# Altium PCB MedusaTester.PcbDoc
Units mil, origin at the board's own origin, x right, y up, seen from the top; angles counter-clockwise.
Board outline 3650 x 3280 mil, 2 copper layers (Top Layer, Bottom Layer); 21 components, 119 nets, 319 pads, 9 vias.
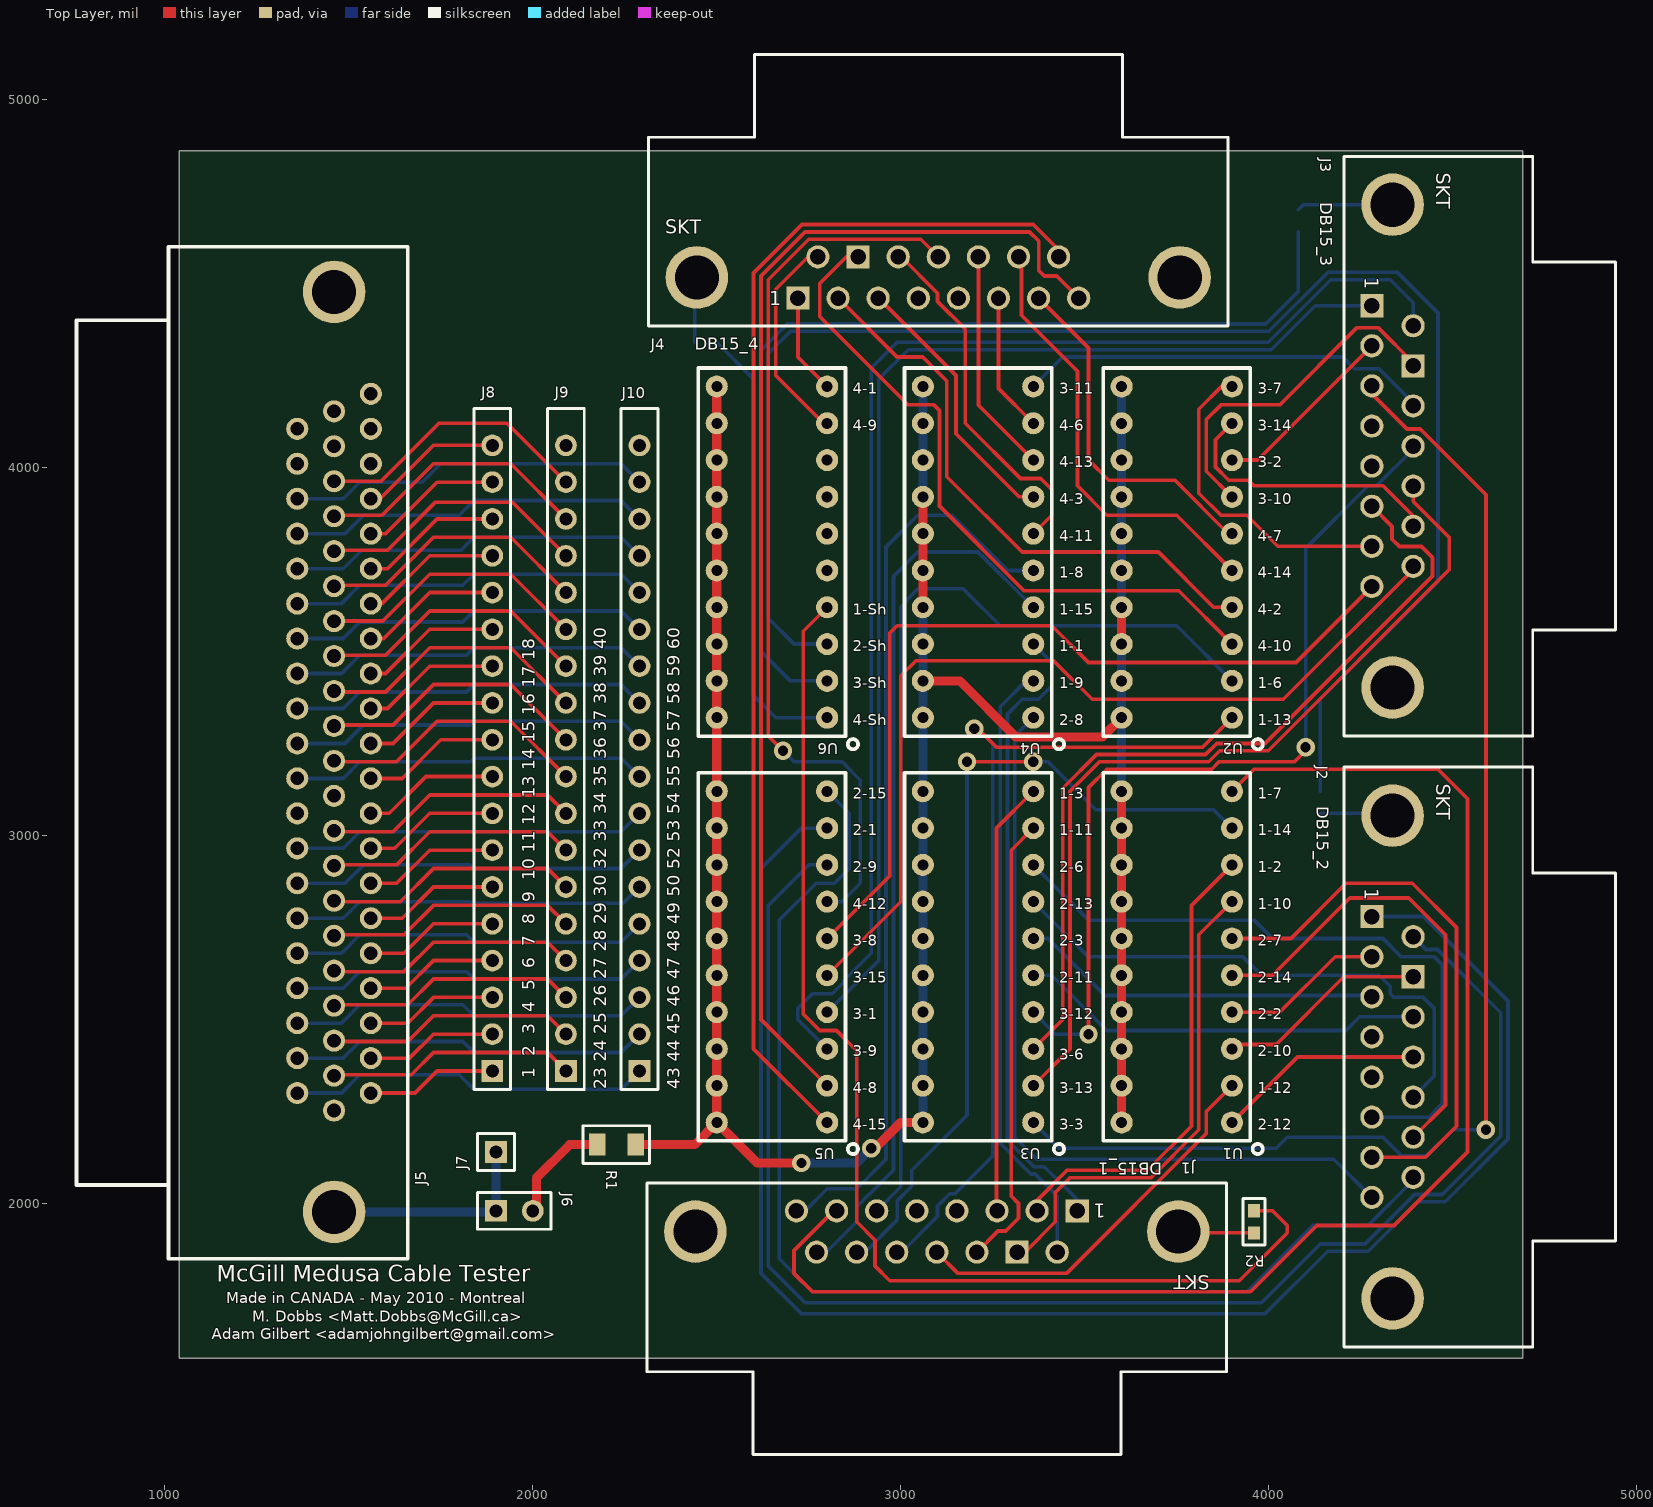
[diagram p0: Top Layer view]
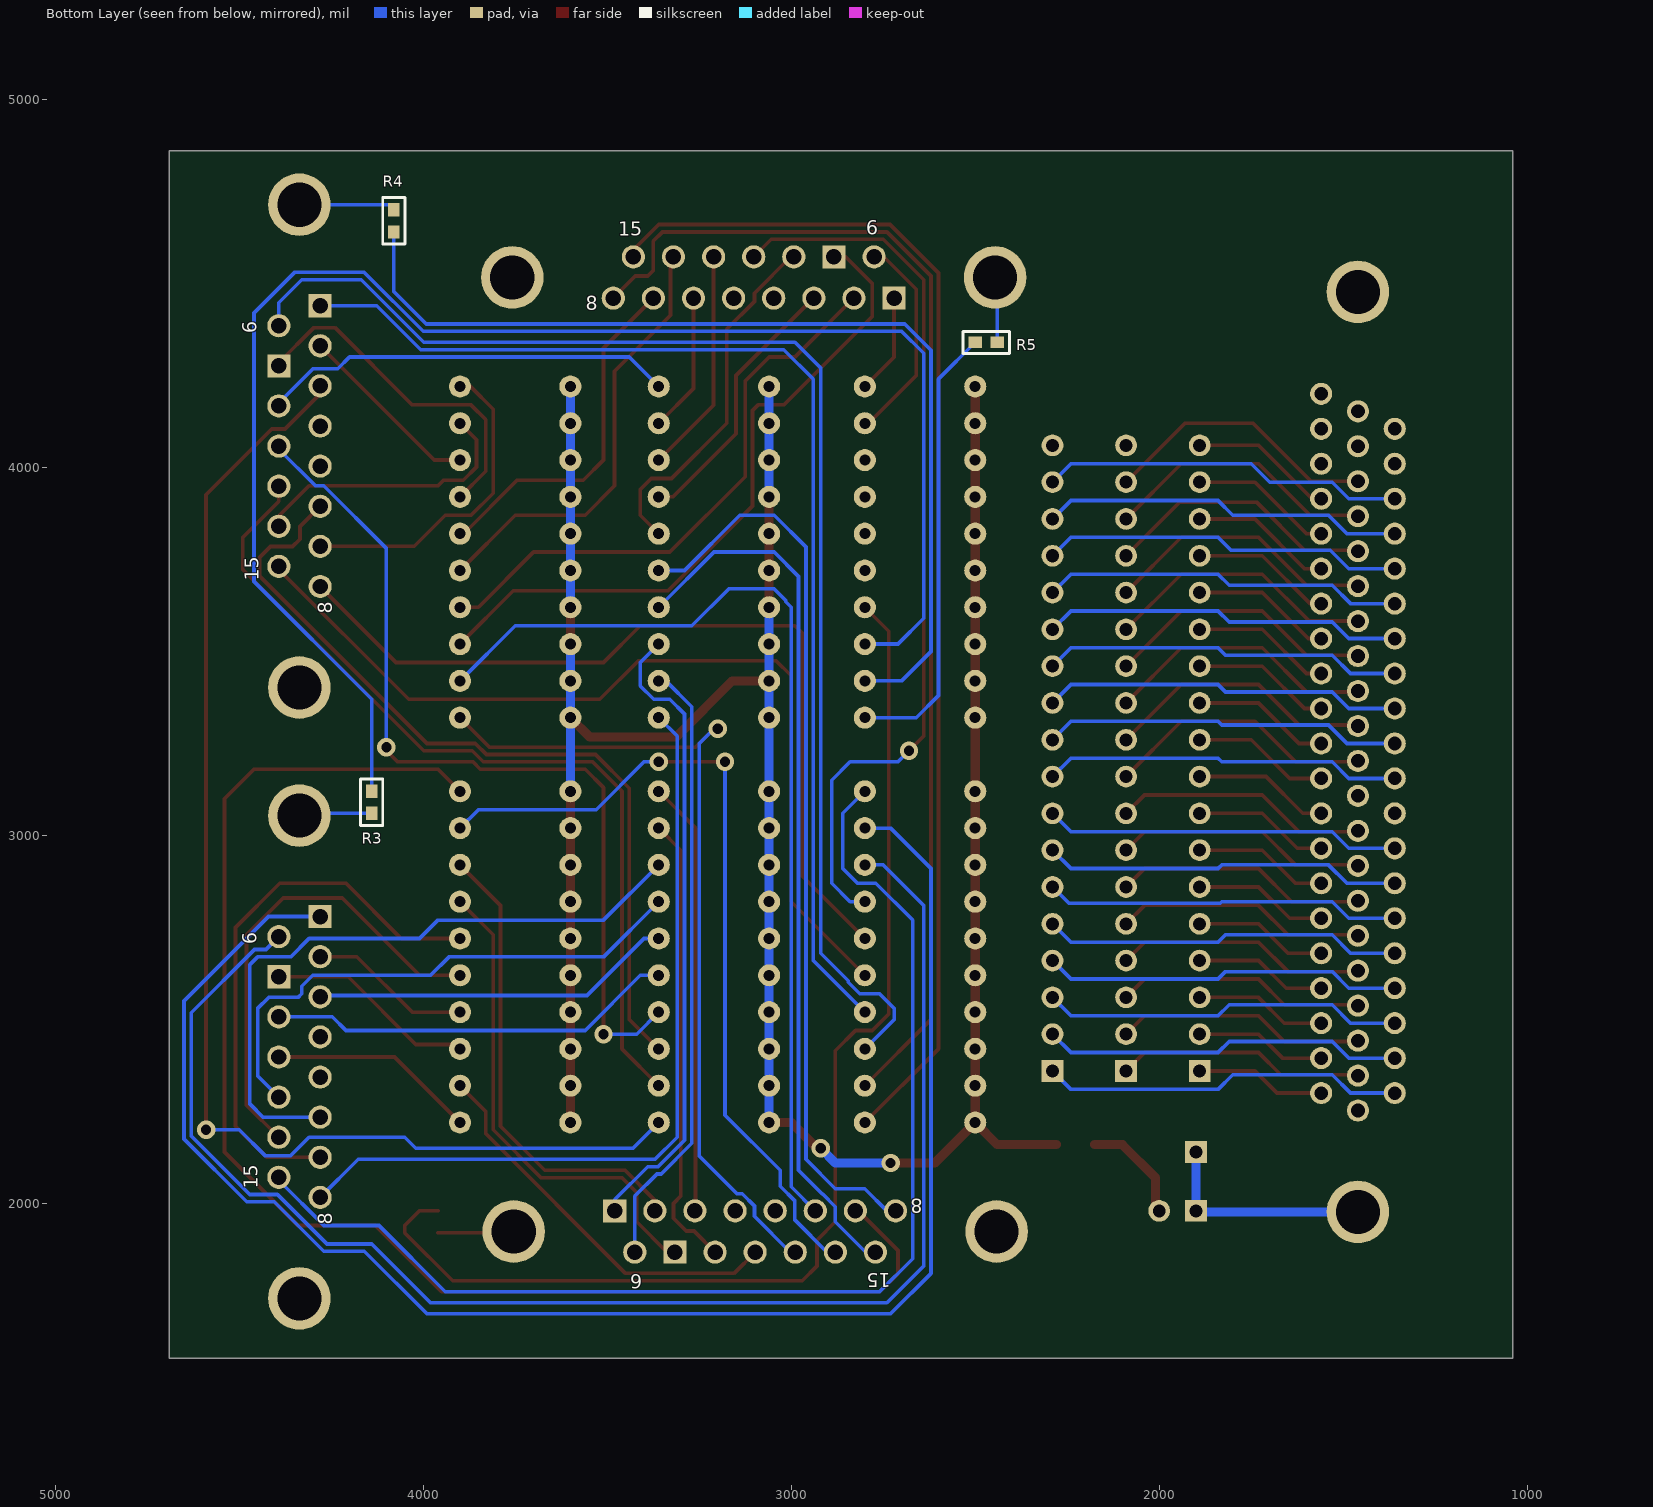
[diagram p1: Bottom Layer view, seen from below]

## Layer stack, top to bottom
Top Layer: signal copper 1.4
Dielectric: core 12.6, FR-4, Dk 4.8
Bottom Layer: signal copper 1.4

## Board outline
1040,4860 1040,1580 4690,1580 4690,4860

## Design rules (kind name [scope] priority, off if disabled: settings)
Clearance [All] p1: gap=10
HoleSize [All] p1: absolutevalues=TRUE maxlimit=150 minlimit=1 maxpercent=80.000 minpercent=20.000
PolygonConnect [All] p1: connectstyle=Relief reliefconductorwidth=10 reliefentries=4 polygonreliefangle="90 Angle"
RoutingVias [All] p1: holewidth=28 width=50 viastyle="Through Hole" minholewidth=28 minwidth=50 maxholewidth=28 maxwidth=50
SilkscreenOverComponentPads [All] p1: minsilkscreentomaskgap=10
SolderMaskExpansion [All] p1: expansion=4
Width [All] p1: maxlimit=100 minlimit=10 preferedwidth=10
26 further rules are at their usual default settings.

## Classes and differential pairs
component class LEDs: R1 U1 U2 U3 U4 U5 U6
component class MedussaTester: J1 J2 J3 J4 J5 J6 J7 J8 J9 J10 R2 R3 R4 R5

## Components (designator, comment, footprint, x,y, rotation, side; value= is the part's Value field where it differs from the comment)
J1 "DB15_FEMALE" DSUB/RS.318/TM/15 3480,1980 r180 top
J2 "DB15_FEMALE" DSUB/RS.318/TM/15 4280,2780 r270 top
J3 "DB15_FEMALE" DSUB/RS.318/TM/15 4280,4440 r270 top
J4 "DB15_FEMALE" DSUB/RS.318/TM/15 2720,4460 r0 top
J5 "HD_DB62" HD_DB62 1560,4200 r270 top
J6 "Header2" HDR1X2 1900,1980 r0 top
J7 "Header1" HDR1 1900,2140 r90 top
J8 "Header18" HDR1X18 1890,2360 r90 top
J9 "Header18" HDR1X18 2090,2360 r90 top
J10 "Header18" HDR1X18 2290,2360 r90 top
R1 "25" 1206 2280,2160 r180 top
R2 "10k Ohms" 0603 3960,1980 r270 top
R3 "10k Ohms" 0603 4140,3120 r270 bottom
R4 "10k Ohms" 0603 4080,4640 r90 bottom
R5 "10k Ohms" 0603 2500,4340 r180 bottom
U1 "LED10array" LED10array 3900,2220 r180 top
U2 "LED10array" LED10array 3900,3320 r180 top
U3 "LED10array" LED10array 3360,2220 r180 top
U4 "LED10array" LED10array 3360,3320 r180 top
U5 "LED10array" LED10array 2800,2220 r180 top
U6 "LED10array" LED10array 2800,3320 r180 top

## Footprints (in the part's own frame and the unit in brackets; to place one, negate y for a bottom-side part, rotate by r counter-clockwise, add the part's x,y. Pads: shape width x height; smd on the part's side, far side on the other; paste and mask are expansions set on the pad)
0603 [mil]
  rect 36x32 smd: 1(0,0) 2(60,0)
  silkscreen extent -33,-30 93,30
1206 [mil]
  rect 45x60 smd: 1(0,0) 2(105,0)
  silkscreen extent -37,-51 144,51
DSUB/RS.318/TM/15 [mil]
  rect 63x63 hole 42: 1(0.47,0.25) 10(163.97,112.25)
  round 63 hole 42: 2(109.47,0.25) 3(218.47,0.25) 4(327.47,0.25) 5(436.47,0.25) 6(545.47,0.25) 7(654.47,0.25) 8(763.47,0.25) 9(54.97,112.25) 11(272.97,112.25) 12(381.97,112.25) 13(490.97,112.25) 14(599.97,112.25) 15(708.97,112.25)
  round 170 hole 120: Hole29(1037.97,56.25) Hole30(-274.03,56.25)
  silkscreen extent -406,-75 1169,662
HD_DB62 [mil]
  round 60 hole 37: 1(1900,0) 2(1805,0) 3(1710,0) 4(1615,0) 5(1520,0) 6(1425,0) 7(1330,0) 8(1235,0) 9(1140,0) 10(1045,0) 11(950,0) 12(855,0) 13(760,0) 14(665,0) 15(570,0) 16(475,0) 17(380,0) 18(285,0) 19(190,0) 20(95,0) 21(0,0) 22(1947.5,-100) 23(1852.5,-100) 24(1757.5,-100) 25(1662.5,-100) 26(1567.5,-100) 27(1472.5,-100) 28(1377.5,-100) 29(1282.5,-100) 30(1187.5,-100) 31(1092.5,-100) 32(997.5,-100) 33(902.5,-100) 34(807.5,-100) 35(712.5,-100) 36(617.5,-100) 37(522.5,-100) 38(427.5,-100) 39(332.5,-100) 40(237.5,-100) 41(142.5,-100) 42(47.5,-100) 43(1900,-200) 44(1805,-200) 45(1710,-200) 46(1615,-200) 47(1520,-200) 48(1425,-200) 49(1330,-200) 50(1235,-200) 51(1140,-200) 52(1045,-200) 53(950,-200) 54(855,-200) 55(760,-200) 56(665,-200) 57(570,-200) 58(475,-200) 59(380,-200) 60(285,-200) 61(190,-200) 62(95,-200)
  round 170 hole 120: HOLE63(2223,-100) HOLE64(-277,-100)
  silkscreen extent -400,-800 2350,100
HDR1 [mm]
  rect 1.5x1.5 hole 0.889: 1(0,0)
  silkscreen extent -1.27,-1.27 1.27,1.27
HDR1X2 [mm]
  rect 1.5x1.5 hole 0.889: 1(0,0)
  round 1.5 hole 0.889: 2(2.54,0)
  silkscreen extent -1.27,-1.27 3.81,1.27
HDR1X18 [mm]
  rect 1.5x1.5 hole 0.9: 1(0,0)
  round 1.5 hole 0.9: 2(2.54,0) 3(5.08,0) 4(7.62,0) 5(10.16,0) 6(12.7,0) 7(15.24,0) 8(17.78,0) 9(20.32,0) 10(22.86,0) 11(25.4,0) 12(27.94,0) 13(30.48,0) 14(33.02,0) 15(35.56,0) 16(38.1,0) 17(40.64,0) 18(43.18,0)
  silkscreen extent -1.27,-1.27 45.72,1.27
LED10array [mil]
  round 60 hole 30: 1(0,0) 2(0,-100) 3(0,-200) 4(0,-300) 5(0,-400) 6(0,-500) 7(0,-600) 8(0,-700) 9(0,-800) 10(0,-900) 11(300,-900) 12(300,-800) 13(300,-700) 14(300,-600) 15(300,-500) 16(300,-400) 17(300,-300) 18(300,-200) 19(300,-100) 20(300,0)
  silkscreen extent -84,-950 350,86

## Part data
J7: "TestPoint1"
R1: library part Res1206, "Resistor"
R2 R3 R4 R5: library part Res0603, "Resistor"

## Via types
v1: diameter 50, hole 28, Top Layer to Bottom Layer, 9 vias

## Nets (pads, with @x,y where several pads share a name; then routed paths per layer and width w, separated by ;. In a path a pad name is that pad's centre, name@x,y a point inside that pad or via, vN(x,y) a via of type N, cw(c..) or ccw(c..) an arc to the next point about the centre after c; other vN are vias at no path point)
0V: J6.2 R1.2 | length 316.4
  Top Layer w10: J6.2@2010,1990 J6.2 J6.2@2020,1980
  Top Layer w25: J6.2@2010,1990 2010,2070 2100,2160 R1.2
5V: J5.HOLE63 J6.1 J7.1 | length 601.2
  Bottom Layer w10: J6.1@1897,1977 J6.1
  Bottom Layer w25: J5.HOLE63 J6.1@1897,1977 ; J6.1 J7.1
LED0: J1.7 U1.10 | length 3888.5
  Top Layer w10: J1.7 2817.27,1979.75 2710,1872.48 2710,1810 2760,1760 3950,1760 4130,1940 4340,1940 4540,2140 4540,3100 4460,3180 3960,3180 U1.10
LED1: J1.14 U1.9 | length 2264.4
  Top Layer w10: v1(3180,3200) v1(3360,3200)
  Bottom Layer w10: J1.14 2902.75,1867.75 2990,1955 2990,2006.93 3030,2046.93 3030,2090 3180,2240 v1(3180,3200) ; v1(3360,3200) 3400,3200 3530,3070 3850,3070 U1.9
LED2: J1.2 U1.8 | length 1287.9
  Top Layer w10: J1.2 3370,1980.28 3370,2008.28 3451.72,2090 3670,2090 3790,2210 3790,2810 U1.8
LED3: J1.10 U1.7 | length 1335.7
  Top Layer w10: J1.10 3337.75,1867.75 3420,1950 3420,2030 3460,2070 3680,2070 3810,2200 3810,2730 U1.7
LED4: J2.7 U1.6 | length 1526.6
  Top Layer w10: U1.6 4060,2720 4210,2870 4390,2870 4510,2750 4510,2210 4425.53,2125.53 J2.7
LED5: J2.14 U1.5 | length 1294.7
  Top Layer w10: U1.5 4010,2620 4220,2830 4380,2830 4480,2730 4480,2267.78 J2.14
LED6: J2.2 U1.4 | length 442.6
  Top Layer w10: U1.4 4030,2520 4180.53,2670.53 J2.2
LED7: J2.10 U1.3 | length 581.7
  Top Layer w10: U1.3 3912.07,2432.07 4020,2432.07 4203.97,2616.03 J2.10 J2.10@4392.25,2607.77
LED8: J1.12 U1.2 | length 1072.3
  Top Layer w10: J1.12 3155.78,1810 3450,1810 3830,2190 3830,2250 U1.2
LED9: J2.12 U1.1 | length 566
  Top Layer w10: U1.1 4078.03,2398.03 J2.12
LED10: J3.7 U2.10 | length 873.9
  Top Layer w10: U2.10 3871.72,4220 3810,4158.28 3810,3930 3870,3870 3940,3870 4024.47,3785.53 J3.7
LED11: J3.14 U2.9 | length 757.6
  Top Layer w10: U2.9 3855,4075 3855,4001.36 3891.36,3965 3945,3965 3960,3950 4310,3950 4392.25,3867.75 J3.14
LED12: J3.2 U2.8 | length 508.9
  Top Layer w10: U2.8 3969.72,4020 J3.2
LED13: J3.10 U2.7 | length 952.7
  Top Layer w10: U2.7 3830,3990 3830,4130 3870,4170 4030,4170 4240,4380 4296.54,4380 4392.25,4284.29 J3.10
LED14: J4.7 U2.6 | length 969.2
  Top Layer w10: J4.7 3510,4324.72 3510,4020 3565,3965 3745,3965 3890,3820 U2.6
LED15: J4.14 U2.5 | length 1203.8
  Top Layer w10: J4.14 3327.97,4564.25 3327.97,4413.75 3480,4261.72 3480,3950 3560,3870 3750,3870 U2.5
LED16: J4.2 U2.4 | length 1570.9
  Top Layer w10: J4.2 2829.75,4460.25 2990,4300 3060,4300 3125,4235 3125,3975 3330,3770 3700,3770 3850,3620 U2.4
LED17: J4.10 U2.3 | length 1864.8
  Top Layer w10: J4.10 2852.25,4572.25 2780,4500 2780,4410 3020,4170 3090,4170 3105,4155 3105,3895 3335,3665 3755,3665 U2.3
LED18: J1.6 U2.2 | length 2693.8
  Bottom Layer w10: J1.6 3000,2045.22 3000,3620 3015,3635 3015,3638.64 3046.36,3670 3170,3670 3270,3570 3750,3570 U2.2
LED19: J1.13 U2.1 | length 2327.2
  Top Layer w10: v1(3200,3290) 3210,3290 3260,3240 3820,3240 U2.1
  Bottom Layer w10: J1.13 3002.75,1867.75 3100,1965 3100,1992.98 3133.27,2026.25 3147.53,2026.25 3250,2128.72 3250,3250 3210,3290 v1(3200,3290)
LED20: J1.3 U3.10 | length 1182.3
  Top Layer w10: J1.3 3260,1981.28 3260,3020 U3.10
LED21: J1.11 U3.9 | length 1244.3
  Top Layer w10: J1.11 3264.28,1925 3285,1925 3320,1960 3320,2000 3300,2020 3300,2960 U3.9
LED22: J2.6 U3.8 | length 1807.6
  Bottom Layer w10: U3.8 3510,2770 3960,2770 4010,2720 4310,2720 4360,2670 4450,2670 4470.93,2649.07 4470.93,2270 4435.47,2234.53 J2.6
LED23: J2.13 U3.7 | length 1486.7
  Bottom Layer w10: U3.7 3510,2670 3930,2670 3980,2620 4300,2620 4330,2590 4330,2570 4340,2560 4420,2560 4450,2530 4450,2346.78 J2.13
LED24: J2.3 U3.6 | length 985.9
  Bottom Layer w10: U3.6 3400,2720 3555,2565 4276.78,2565 J2.3
LED25: J2.11 U3.5 | length 1109.7
  Bottom Layer w10: U3.5 3410,2620 3560,2470 4210,2470 4247.03,2507.03 J2.11
LED26: J3.12 U3.4 | length 2428.6
  Top Layer w10: v1(3510,2460) 3510,3130 3560,3180 3844.85,3180 3864.85,3200 4070,3200 v1@4100,3230
  Bottom Layer w10: U3.4 3420,2460 v1(3510,2460) ; v1(4100,3240) 4100,3780.04 4269.96,3950 4292.48,3950 4392.25,4049.77 J3.12
LED27: J3.6 U3.3 | length 2278.2
  Top Layer w10: U3.3 3440,2500 3440,3128.28 3531.72,3220 3828.28,3220 3858.28,3250 3990,3250 4445,3705 4445,3755 4415,3785 4355,3785 4335,3805 4335,3839.78 J3.6
LED28: J3.13 U3.2 | length 2388.5
  Top Layer w10: U3.2 3460,2420 3460,3120 3540,3200 3836.57,3200 3866.57,3230 3998.28,3230 4490,3721.72 4490,3810 4392.25,3907.75 J3.13
LED29: J3.3 U3.1 | length 3492.1
  Top Layer w10: J3.3 4280.25,4199.75 4375.47,4104.53 4411.51,4104.53 4590,3926.04 v1(4590,2200)
  Bottom Layer w10: U3.1 3430,2150 4020,2150 4050,2180 4310,2180 4360,2130 4430,2130 4500,2200 v1(4590,2200)
LED30: J3.11 U4.10 | length 1125.3
  Bottom Layer w10: U4.10 3440,4300 4200,4300 4231.97,4268.03 4299.51,4268.03 4392.25,4175.29 J3.11
LED31: J4.6 U4.9 | length 379.4
  Top Layer w10: J4.6 3265.47,4214.53 U4.9
LED32: J4.13 U4.8 | length 614
  Top Layer w10: J4.13 3210.97,4169.03 U4.8
LED33: J4.3 U4.7 | length 738
  Top Layer w10: J4.3 2939.75,4460.25 3150,4250 3150,4091.72 3321.72,3920 U4.7
LED34: J4.11 U4.6 | length 982.8
  Top Layer w10: J4.11 3001.23,4572.25 3100,4473.48 3100,4450.92 3175,4375.92 3175,4120 3325,3970 3380,3970 3410,3940 3410,3870 U4.6
LED35: J1.8 U4.5 | length 2463.1
  Bottom Layer w10: J1.8 2739.75,1979.75 2800,2040 2880,2040 2960,2120 2960,3783.64 3046.36,3870 3140,3870 3290,3720 U4.5
LED36: J1.15 U4.4 | length 2408.3
  Bottom Layer w10: J1.15 2797.75,1867.75 2880,1950 2880,1990.98 2915.27,2026.25 2916.25,2026.25 2980,2090 2980,3703.64 3046.36,3770 3210,3770 U4.4
LED37: J1.1 U4.3 | length 1731.3
  Bottom Layer w10: U4.3 3410,3470 3410,3406.36 3373.64,3370 3330,3370 3290,3330 3290,2171.72 3361.72,2100 3390,2100 3479.53,2010.47 J1.1
LED38: J1.9 U4.2 | length 1672.3
  Bottom Layer w10: U4.2 3340,3420 3270,3350 3270,2163.43 3353.43,2080 3365.03,2080 3425.03,2020 J1.9
LED39: J2.8 U4.1 | length 2198.7
  Bottom Layer w10: U4.1 3310,3270 3310,2180 3370,2120 4176.78,2120 J2.8
LED40: J2.15 U5.10 | length 3296
  Bottom Layer w10: U5.10 2860,3060 2860,2910 2820,2870 2770,2870 2670,2770 2670,1850 2760,1760 3940,1760 4120,1940 4269.48,1940 4392.25,2062.77 J2.15
LED41: J2.1 U5.9 | length 4444
  Bottom Layer w10: U5.9 2730,3020 2620,2910 2620,1810 2730,1700 3990,1700 4160,1870 4270,1870 4404.53,2004.53 4479.39,2004.53 4650,2175.15 4650,2550 4420.47,2779.53 J2.1 J2.1@4275.72,2775
LED42: J2.9 U5.8 | length 4063
  Bottom Layer w10: U5.8 2750,2920 2640,2810 2640,1830 2740,1730 3980,1730 4140,1890 4261.72,1890 4396.25,2024.53 4471.1,2024.53 4630,2183.43 4630,2518.28 4458.28,2690 4427.28,2690 J2.9
LED43: J4.12 U5.7 | length 2457.7
  Top Layer w10: v1(2680,3230) 2640,3270 2640,4510 2750,4620 3054.22,4620 J4.12
  Bottom Layer w10: v1(2680,3230) 2710,3200 2840,3200 2890,3150 2890,2870 2840,2820 U5.7
LED44: J3.8 U5.6 | length 2345.9
  Top Layer w10: U5.6 2970,2890 2970,3550 2990,3570 3410,3570 3510,3470 4073.72,3470 J3.8
LED45: J3.15 U5.5 | length 2503.7
  Top Layer w10: U5.5 3000,2820 3000,3433.64 3041.36,3475 3415,3475 3520,3370 4039.48,3370 4392.25,3722.77 J3.15
LED46: J3.1 U5.4 | length 3200.9
  Bottom Layer w10: U5.4 2940,2660 2940,4240 3020,4320 4006.57,4320 4126.1,4439.53 J3.1
LED47: J3.9 U5.3 | length 3657.6
  Bottom Layer w10: U5.3 2720,2500 2720,2530 2760,2570 2813.64,2570 2845,2601.36 2845,2605 2920,2680 2920,4270 2990,4340 3998.28,4340 4168.28,4510 4330,4510 4392.25,4447.75 J3.9
LED48: J4.8 U5.2 | length 3309
  Top Layer w10: U5.2 2620,2500 2620,4520 2740,4640 3350,4640 3375,4615 3375,4535 3390,4520 3423.72,4520 J4.8
LED49: J4.15 U5.1 | length 3322
  Top Layer w10: U5.1 2600,2420 2600,4528.28 2731.72,4660 3360,4660 3428.97,4591.03 J4.15
LED50: J4.1 U6.10 | length 273.2
  Top Layer w10: J4.1 2720.47,4299.53 U6.10
LED51: J4.9 U6.9 | length 579.4
  Top Layer w10: J4.9 2748.25,4572.25 2660,4484 2660,4250 2790,4120 U6.9
LED52: U6.8
LED53: U6.7
LED54: U6.6
LED55: U6.5
LED56: R2.1 U6.4 | length 3241
  Top Layer w10: U6.4 2735,3555 2735,2515 2780,2470 2825,2470 2880,2415 2880,1950 2930,1900 2930,1830 2970,1790 3920,1790 4050,1920 4050,1940 4010,1980 R2.1
LED57: R3.1 U6.3 | length 4298.2
  Bottom Layer w10: U6.3 2710,3520 2640,3590 2640,4310 2700,4370 4000,4370 4160,4530 4350,4530 4460,4420 4460,3690 4140,3370 R3.1
LED58: R4.1 U6.2 | length 2719.4
  Bottom Layer w10: U6.2 2700,3420 2620,3500 2620,4318.28 2691.72,4390 3991.72,4390 4080,4478.28 R4.1
LED59: R5.1 U6.1 | length 1226.3
  Bottom Layer w10: R5.1 2600,4240 2600,3380 2660,3320 U6.1
NetJ1_Hole30: J1.Hole30 R2.2 | length 207.5
  Top Layer w10: J1.Hole30 3757.78,1920 R2.2
NetJ2_Hole30: J2.Hole30 R3.2 | length 275.1
  Top Layer w10: J2.Hole30@4282.22,3000 J2.Hole30
  Bottom Layer w10: R3.2 4330.28,3060 J2.Hole30
NetJ3_Hole30: J3.Hole30 R4.2 | length 270.5
  Top Layer w10: J3.Hole30@4330.28,4720 J3.Hole30
  Bottom Layer w10: R4.2 4094.03,4714.03 J3.Hole30
NetJ4_Hole30: J4.Hole30 R5.2 | length 184
  Top Layer w10: J4.Hole30@2442.22,4520 J4.Hole30
  Bottom Layer w10: R5.2 2440,4510.28 J4.Hole30
NetJ5_1: J5.1 J8.1 | length 354.9
  Top Layer w10: J5.1 1680,2300 1740,2360 J8.1
NetJ5_2: J5.2 J8.2 | length 356.9
  Top Layer w10: J5.2 1665,2395 1730,2460 J8.2
NetJ5_3: J5.3 J8.3 | length 359
  Top Layer w10: J5.3 1660,2490 1730,2560 J8.3
NetJ5_4: J5.4 J8.4 | length 361.1
  Top Layer w10: J5.4 1655,2585 1730,2660 J8.4
NetJ5_5: J5.5 J8.5 | length 363.1
  Top Layer w10: J5.5 1650,2680 1730,2760 J8.5
NetJ5_6: J5.6 J8.6 | length 365.2
  Top Layer w10: J5.6 1645,2775 1730,2860 J8.6
NetJ5_7: J5.7 J8.7 | length 367.3
  Top Layer w10: J5.7 1630,2870 1720,2960 J8.7
NetJ5_8: J5.8 J8.8 | length 369.4
  Top Layer w10: J5.8 1625,2965 1720,3060 J8.8
NetJ5_9: J5.9 J8.9 | length 371.4
  Top Layer w10: J5.9 1610,3060 1710,3160 J8.9
NetJ5_10: J5.10 J8.10 | length 373.5
  Top Layer w10: J5.10 1645,3155 1750,3260 J8.10
NetJ5_11: J5.11 J8.11 | length 375.6
  Top Layer w10: J5.11 1620,3250 1730,3360 J8.11
NetJ5_12: J5.12 J8.12 | length 377.6
  Top Layer w10: J5.12 1605,3345 1720,3460 J8.12
NetJ5_13: J5.13 J8.13 | length 379.7
  Top Layer w10: J5.13 1600,3440 1720,3560 J8.13
NetJ5_14: J5.14 J8.14 | length 381.8
  Top Layer w10: J5.14 1595,3535 1720,3660 J8.14
NetJ5_15: J5.15 J8.15 | length 383.8
  Top Layer w10: J5.15 1590,3630 1720,3760 J8.15
NetJ5_16: J5.16 J8.16 | length 385.9
  Top Layer w10: J5.16 1605,3725 1740,3860 J8.16
NetJ5_17: J5.17 J8.17 | length 388
  Top Layer w10: J5.17 1600,3820 1740,3960 J8.17
NetJ5_18: J5.18 J8.18 | length 390.1
  Top Layer w10: J5.18 1585,3915 1730,4060 J8.18
NetJ5_23: J5.23 J9.1 | length 676.6
  Top Layer w10: J5.23 1462.5,2350 1670,2350 1730,2410 2040,2410 J9.1
NetJ5_24: J5.24 J9.2 | length 680.7
  Top Layer w10: J5.24 1462.5,2440 1660,2440 1730,2510 2040,2510 J9.2
NetJ5_25: J5.25 J9.3 | length 680.7
  Top Layer w10: J5.25 1462.5,2540 1660,2540 1730,2610 2040,2610 J9.3
NetJ5_26: J5.26 J9.4 | length 684.9
  Top Layer w10: J5.26 1462.5,2630 1650,2630 1730,2710 2040,2710 J9.4
NetJ5_27: J5.27 J9.5 | length 684.9
  Top Layer w10: J5.27 1462.5,2730 1650,2730 1730,2810 2040,2810 J9.5
NetJ5_28: J5.28 J9.6 | length 689
  Top Layer w10: J5.28 1462.5,2820 1640,2820 1730,2910 2040,2910 J9.6
NetJ5_29: J5.29 J9.7 | length 689
  Top Layer w10: J5.29 1462.5,2920 1630,2920 1720,3010 2040,3010 J9.7
NetJ5_30: J5.30 J9.8 | length 693.2
  Top Layer w10: J5.30 1462.5,3010 1620,3010 1720,3110 2040,3110 J9.8
NetJ5_32: J5.32 J9.9 | length 738.7
  Top Layer w10: J5.32 1462.5,3200 1630,3200 1740,3310 1940,3310 J9.9
NetJ5_33: J5.33 J9.10 | length 738.7
  Top Layer w10: J5.33 1462.5,3300 1620,3300 1730,3410 1940,3410 J9.10
NetJ5_34: J5.34 J9.11 | length 742.9
  Top Layer w10: J5.34 1462.5,3390 1600,3390 1720,3510 1940,3510 J9.11
NetJ5_35: J5.35 J9.12 | length 742.9
  Top Layer w10: J5.35 1462.5,3490 1600,3490 1720,3610 1940,3610 J9.12
NetJ5_36: J5.36 J9.13 | length 744.9
  Top Layer w10: J5.36 1592.5,3582.5 1720,3710 1840,3710 1940,3710 J9.13
NetJ5_37: J5.37 J9.14 | length 747
  Top Layer w10: J5.37 1462.5,3680 1600,3680 1730,3810 1940,3810 J9.14
NetJ5_38: J5.38 J9.15 | length 745.6
  Top Layer w10: J5.38 1462.5,3775 1605,3775 1735.85,3905.85 1944.15,3905.85 J9.15
NetJ5_39: J5.39 J9.16 | length 751.2
  Top Layer w10: J5.39 1462.5,3870 1590,3870 1730,4010 1940,4010 J9.16
NetJ5_40: J5.40 J9.17 | length 756.5
  Top Layer w10: J5.40 1587.5,3962.5 1745,4120 ; 1750,4120 1930,4120 J9.17
NetJ5_43: J5.43 J10.1 | length 988
  Bottom Layer w10: J5.43 1480,2300 1530,2350 1800,2350 1840,2310 2240,2310 J10.1
NetJ5_44: J5.44 J10.2 | length 981.8
  Bottom Layer w10: J5.44 1485,2395 1530,2440 1810,2440 1840,2410 2240,2410 J10.2
NetJ5_45: J5.45 J10.3 | length 983.8
  Bottom Layer w10: J5.45 1480,2490 1530,2540 1810,2540 1840,2510 2240,2510 J10.3
NetJ5_46: J5.46 J10.4 | length 977.6
  Bottom Layer w10: J5.46 1485,2585 1530,2630 1820,2630 1840,2610 2240,2610 J10.4
NetJ5_47: J5.47 J10.5 | length 979.7
  Bottom Layer w10: J5.47 1480,2680 1530,2730 1820,2730 1840,2710 2240,2710 J10.5
NetJ5_48: J5.48 J10.6 | length 969
  Bottom Layer w10: J5.48 1485,2775 1530,2820 1830,2820 1834.53,2815.47 2245.47,2815.47 J10.6
NetJ5_49: J5.49 J10.7 | length 975.6
  Bottom Layer w10: J5.49 1490,2870 1540,2920 1830,2920 1840,2910 2240,2910 J10.7
NetJ5_50: J5.50 J10.8 | length 969.4
  Bottom Layer w10: J5.50 1485,2965 1530,3010 2240,3010 J10.8
NetJ5_52: J5.52 J10.9 | length 973.5
  Bottom Layer w10: J5.52 1485,3155 1530,3200 1830,3200 1840,3210 2240,3210 J10.9
NetJ5_53: J5.53 J10.10 | length 975.6
  Bottom Layer w10: J5.53 1490,3250 1540,3300 1830,3300 1840,3310 2240,3310 J10.10
NetJ5_54: J5.54 J10.11 | length 977.6
  Bottom Layer w10: J5.54 1485,3345 1530,3390 1820,3390 1840,3410 2240,3410 J10.11
NetJ5_55: J5.55 J10.12 | length 979.7
  Bottom Layer w10: J5.55 1480,3440 1530,3490 1820,3490 1840,3510 2240,3510 J10.12
NetJ5_56: J5.56 J10.13 | length 981.8
  Bottom Layer w10: J5.56 1485,3535 1530,3580 1810,3580 1840,3610 2240,3610 J10.13
NetJ5_57: J5.57 J10.14 | length 983.8
  Bottom Layer w10: J5.57 1480,3630 1530,3680 1810,3680 1840,3710 2240,3710 J10.14
NetJ5_58: J5.58 J10.15 | length 985.9
  Bottom Layer w10: J5.58 1485,3725 1535,3775 1805,3775 1840,3810 2240,3810 J10.15
NetJ5_59: J5.59 J10.16 | length 988
  Bottom Layer w10: J5.59 1490,3820 1540,3870 1800,3870 1840,3910 2240,3910 J10.16
NetJ5_60: J5.60 J10.17 | length 990.1
  Bottom Layer w10: J5.60 1485,3915 1530,3960 1700,3960 1750,4010 2240,4010 J10.17
NetR1_1: R1.1 U1.11 U1.12 U1.13 U1.14 U1.15 U1.16 U1.17 U1.18 U1.19 U1.20 U2.11 U2.12 U2.13 U2.14 U2.15 U2.16 U2.17 U2.18 U2.19 U2.20 U3.11 U3.12 U3.13 U3.14 U3.15 U3.16 U3.17 U3.18 U3.19 U3.20 U4.11 U4.12 U4.13 U4.14 U4.15 U4.16 U4.17 U4.18 U4.19 U4.20 U5.11 U5.12 U5.13 U5.14 U5.15 U5.16 U5.17 U5.18 U5.19 U5.20 U6.11 U6.12 U6.13 U6.14 U6.15 U6.16 U6.17 U6.18 U6.19 U6.20 | length 7520.9
  Top Layer w25: R1.1 2440,2160 U5.20 ; U6.11 U6.12 U6.13 U6.14 U6.15 U6.16 U6.17 U6.18 U6.19 U6.20 U5.11 U5.12 U5.13 U5.14 U5.15 U5.16 U5.17 U5.18 U5.19 U5.20 ; v1(2730,2110) 2610,2110 U5.20 ; v1(2920,2150) 2930,2150 3000,2220 U3.20 ; U4.19 3160,3420 3312.5,3267.5 3547.5,3267.5 U2.20 ; U4.17 U4.16 U4.15 U4.14 ; U1.20 U1.19 U1.18 U1.17 U1.16 U1.15 U1.14 U1.13 U1.12 U1.11 ; U2.18 U2.17
  Bottom Layer w25: v1(2730,2110) 2880,2110 v1(2920,2150) ; U3.20 U3.19 U3.18 U3.17 U3.16 U3.15 U3.14 U3.13 U3.12 U3.11 U4.20 U4.19 U4.18 U4.17 ; U4.14 U4.13 U4.12 U4.11 ; U1.11 U2.20 U2.19 U2.18 ; U2.17 U2.16 U2.15 U2.14 U2.13 U2.12 U2.11
pads on no net: J1.4 J1.5 J1.Hole29 J2.4 J2.5 J2.Hole29 J3.4 J3.5 J3.Hole29 J4.4 J4.5 J4.Hole29 J5.19 J5.20 J5.21 J5.22 J5.31 J5.41 J5.42 J5.51 J5.61 J5.62 J5.HOLE64 J9.18 J10.18

## Polygon pours and split planes (outlines as drawn)
no net on Mechanical 1 "TopOverlay-No Net" (none): 1040,1580 1040,4870 4690,4870 4690,1580

## Silkscreen, mask and mechanical layers (free items; w line width, h text height)
Top Overlay:
  text "DB15_3" at 4140,4720 h33 r270
  text "DB15_4" at 2440,4320 h33
  text "4-1" at 2870,4200 h30
  text "3-11" at 3430,4200 h30
  text "3-7" at 3970,4200 h30
  text "4-9" at 2870,4100 h30
  text "4-6" at 3430,4100 h30
  text "3-14" at 3970,4100 h30
  text "4-13" at 3430,4000 h30
  text "3-2" at 3970,4000 h30
  text "4-3" at 3430,3900 h30
  text "3-10" at 3970,3900 h30
  text "4-11" at 3430,3800 h30
  text "4-7" at 3970,3800 h30
  text "1-8" at 3430,3700 h30
  text "4-14" at 3970,3700 h30
  text "1-Sh" at 2870,3600 h30
  text "1-15" at 3430,3600 h30
  text "4-2" at 3970,3600 h30
  text "2-Sh" at 2870,3500 h30
  text "1-1" at 3430,3500 h30
  text "4-10" at 3970,3500 h30
  text "3-Sh" at 2870,3400 h30
  text "1-9" at 3430,3400 h30
  text "1-6" at 3970,3400 h30
  text "4-Sh" at 2870,3300 h30
  text "2-8" at 3430,3300 h30
  text "1-13" at 3970,3300 h30
  text "2-15" at 2870,3100 h30
  text "1-3" at 3430,3100 h30
  text "1-7" at 3970,3100 h30
  text "DB15_2" at 4130,3080 h33 r270
  text "2-1" at 2870,3000 h30
  text "1-11" at 3430,3000 h30
  text "1-14" at 3970,3000 h30
  text "2-9" at 2870,2900 h30
  text "2-6" at 3430,2900 h30
  text "1-2" at 3970,2900 h30
  text "4-12" at 2870,2800 h30
  text "2-13" at 3430,2800 h30
  text "1-10" at 3970,2800 h30
  text "3-8" at 2870,2700 h30
  text "2-3" at 3430,2700 h30
  text "2-7" at 3970,2700 h30
  text "3-15" at 2870,2600 h30
  text "2-11" at 3430,2600 h30
  text "2-14" at 3970,2600 h30
  text "3-1" at 2870,2500 h30
  text "3-12" at 3430,2500 h30
  text "2-2" at 3970,2500 h30
  text "3-9" at 2870,2400 h30
  text "2-10" at 3970,2400 h30
  text "3-6" at 3430,2390 h30
  text "1  2  3  4  5  6  7  8  9  10 11 12 13 14 15 16 17 18" at 2005,2340 h34 r90
  text "23 24 25 26 27 28 29 30 32 33 34 35 36 37 38 39 40" at 2200,2310 h34 r90
  text "43 44 45 46 47 48 49 50 52 53 54 55 56 57 58 59 60" at 2400,2310 h34 r90
  text "4-8" at 2870,2300 h30
  text "3-13" at 3430,2300 h30
  text "1-12" at 3970,2300 h30
  text "4-15" at 2870,2200 h30
  text "3-3" at 3430,2200 h30
  text "2-12" at 3970,2200 h30
  text "DB15_1" at 3710,2110 h33 r180
  text "McGill Medusa Cable Tester" at 1141,1787 h45
  text "Made in CANADA - May 2010 - Montreal" at 1167,1729 h30
  text "M. Dobbs <Matt.Dobbs@McGill.ca>" at 1238,1678 h30
  text "Adam Gilbert <adamjohngilbert@gmail.com>" at 1127,1631 h30

## Text inside footprints (layer, text, board x,y; h text height)
J1: Top Overlay "1" at 3557.03,1999.75 h37.5 r180; Top Overlay "SKT" at 3840.2,1804.87 h37.5 r180; Bottom Overlay "15" at 2730,1810 h37.5 r180; Bottom Overlay "8" at 2641.92,2013.38 h37.5 r180; Bottom Overlay "9" at 3436.92,1768.37 h37.5
J2: Top Overlay "1" at 4260.25,2857.03 h37.5 r270; Top Overlay "SKT" at 4455.13,3140.2 h37.5 r270; Bottom Overlay "15" at 4450,2040 h37.5 r270; Bottom Overlay "8" at 4246.62,1941.92 h37.5 r270; Bottom Overlay "9" at 4491.63,2736.92 h37.5 r90
J3: Top Overlay "1" at 4260.25,4517.03 h37.5 r270; Top Overlay "SKT" at 4455.13,4800.2 h37.5 r270; Bottom Overlay "15" at 4446.75,3691.49 h37.5 r270; Bottom Overlay "8" at 4246.62,3601.92 h37.5 r270; Bottom Overlay "9" at 4491.63,4396.92 h37.5 r90
J4: Top Overlay "1" at 2642.97,4440.25 h37.5; Top Overlay "SKT" at 2359.8,4635.13 h37.5; Bottom Overlay "15" at 3470,4630 h37.5; Bottom Overlay "8" at 3558.08,4426.62 h37.5; Bottom Overlay "9" at 2763.08,4671.63 h37.5 r180